# Altium PCB PCB.PcbDoc
Units mm, origin at the board's own origin, x right, y up, seen from the top; angles counter-clockwise.
Board outline 42.3 x 32.8 mm, 2 copper layers (Top Layer, Bottom Layer), stack 1.571 mm thick; 14 components, 10 nets, 39 pads, 8 vias.
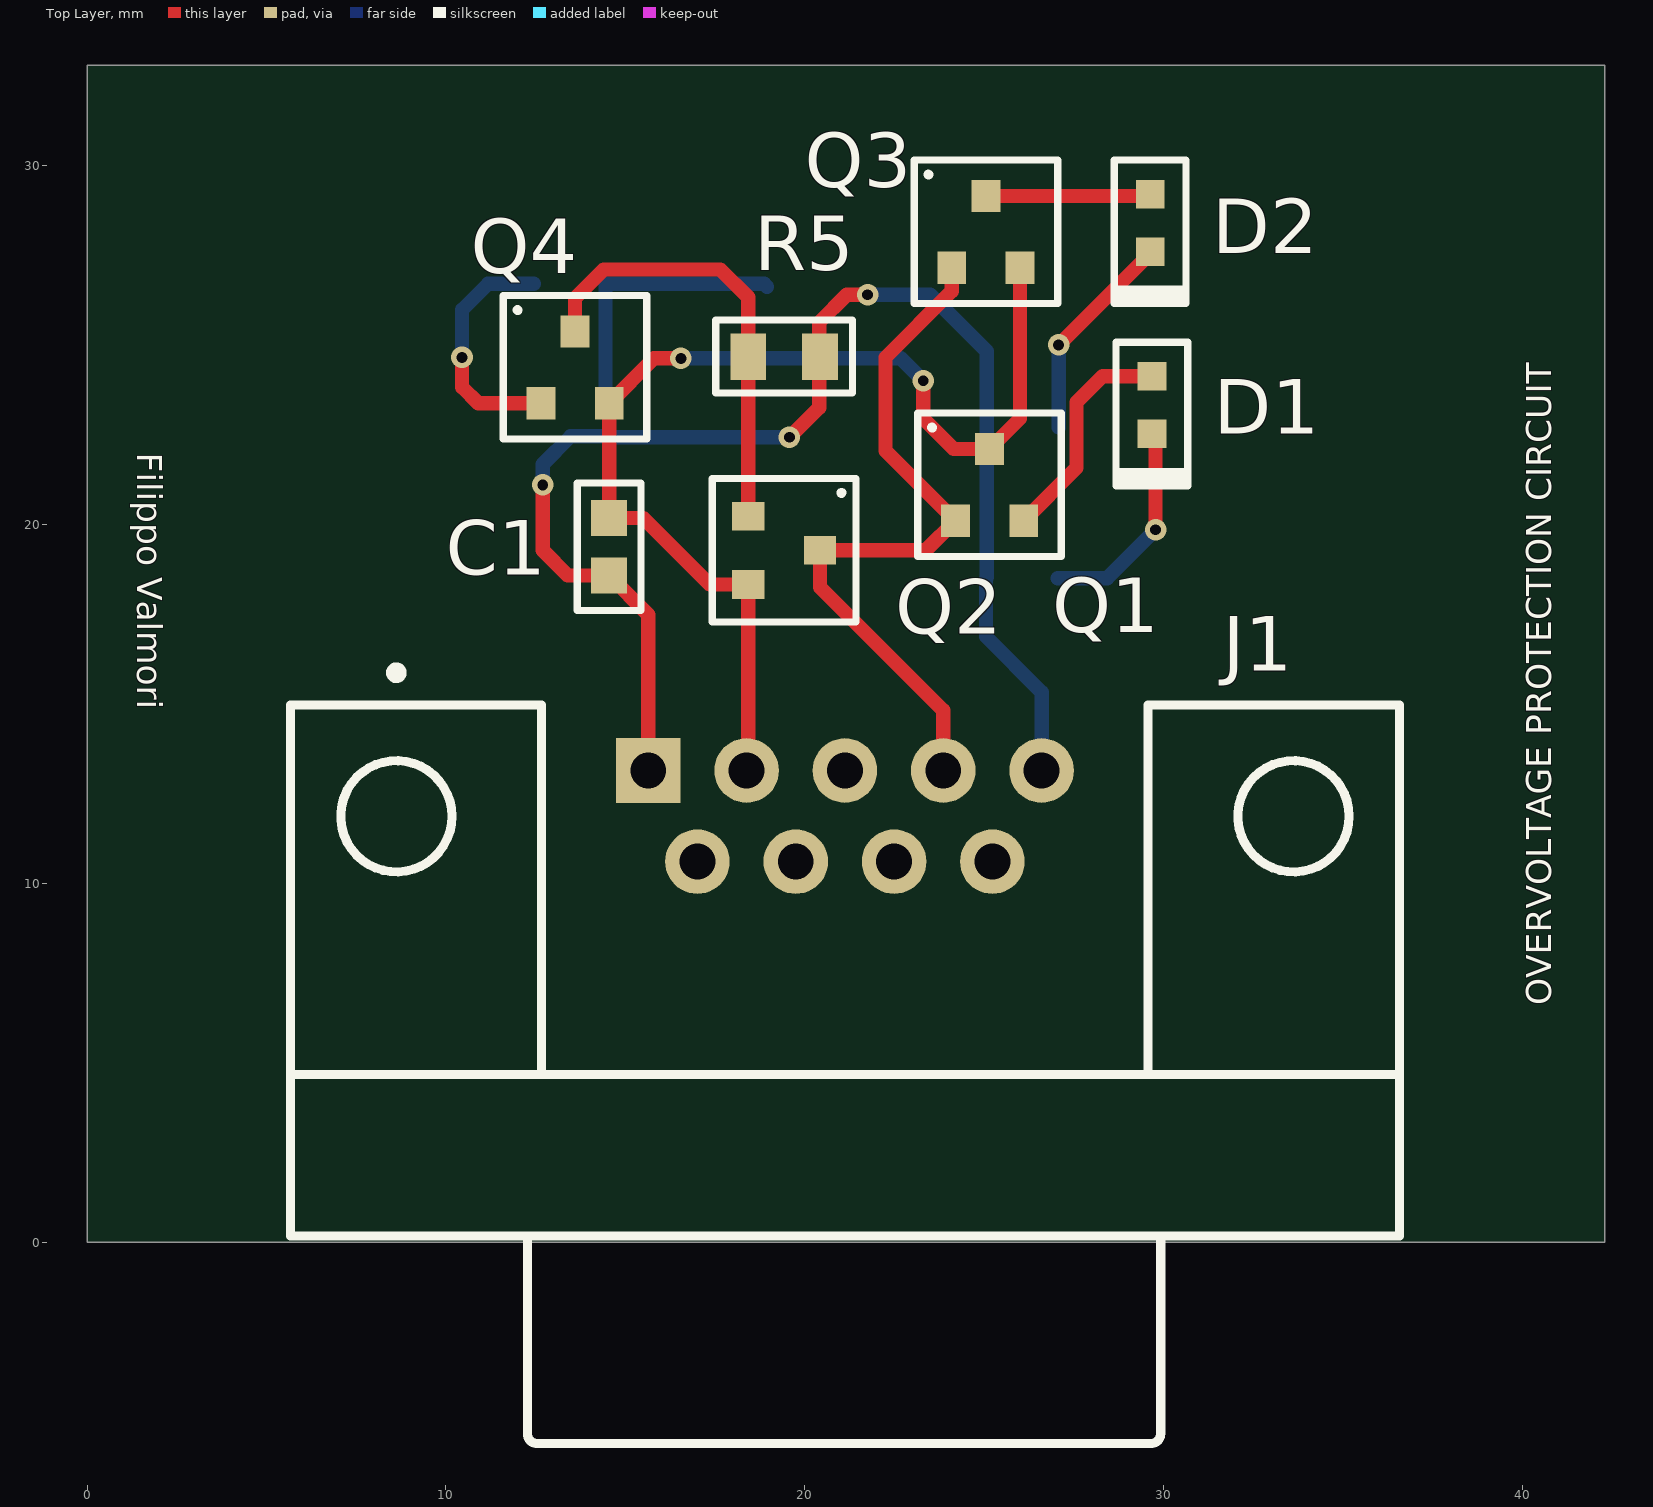
[diagram p0: Top Layer view]
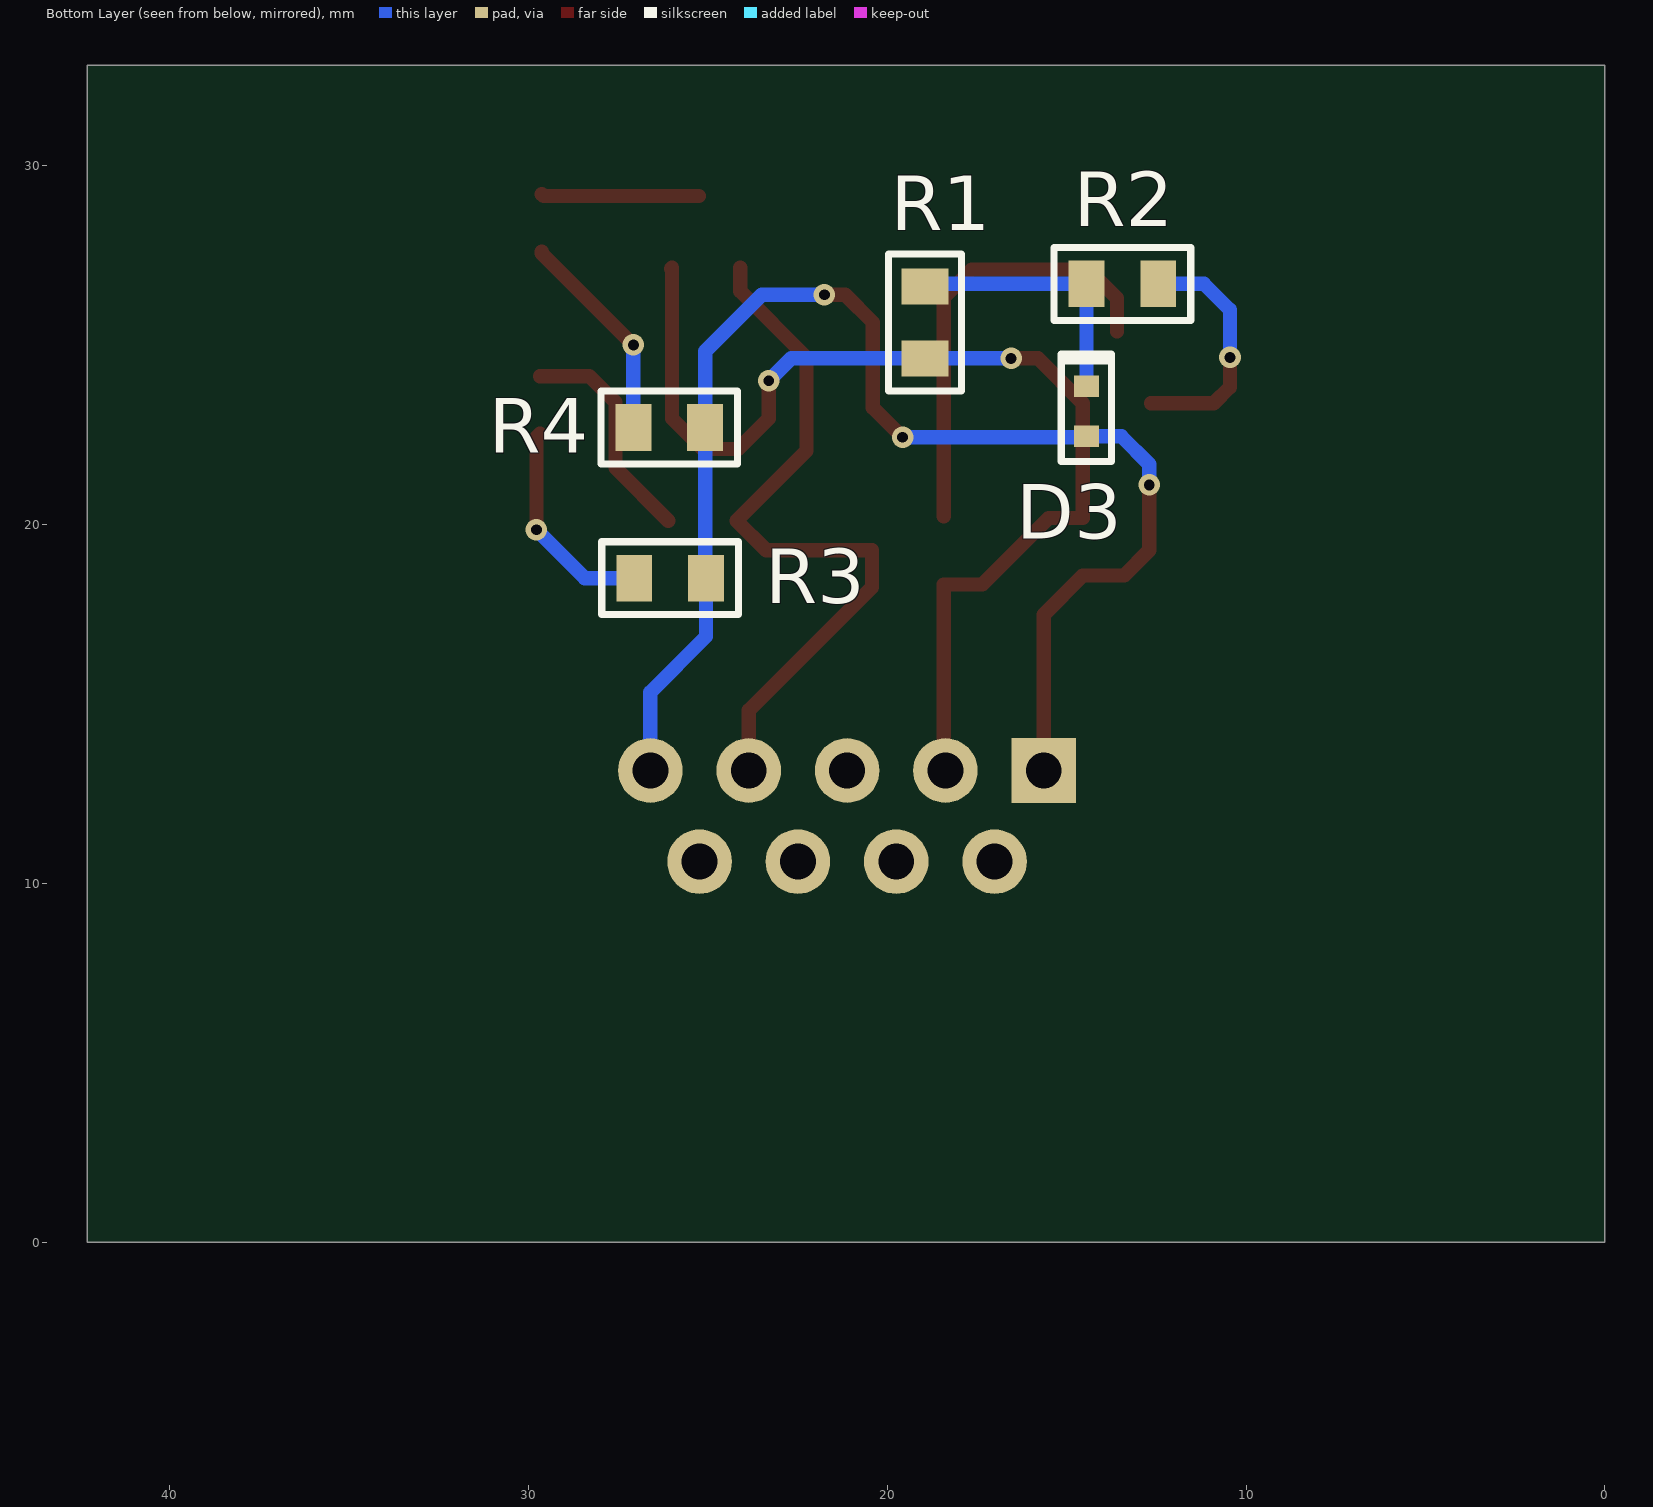
[diagram p1: Bottom Layer view, seen from below]
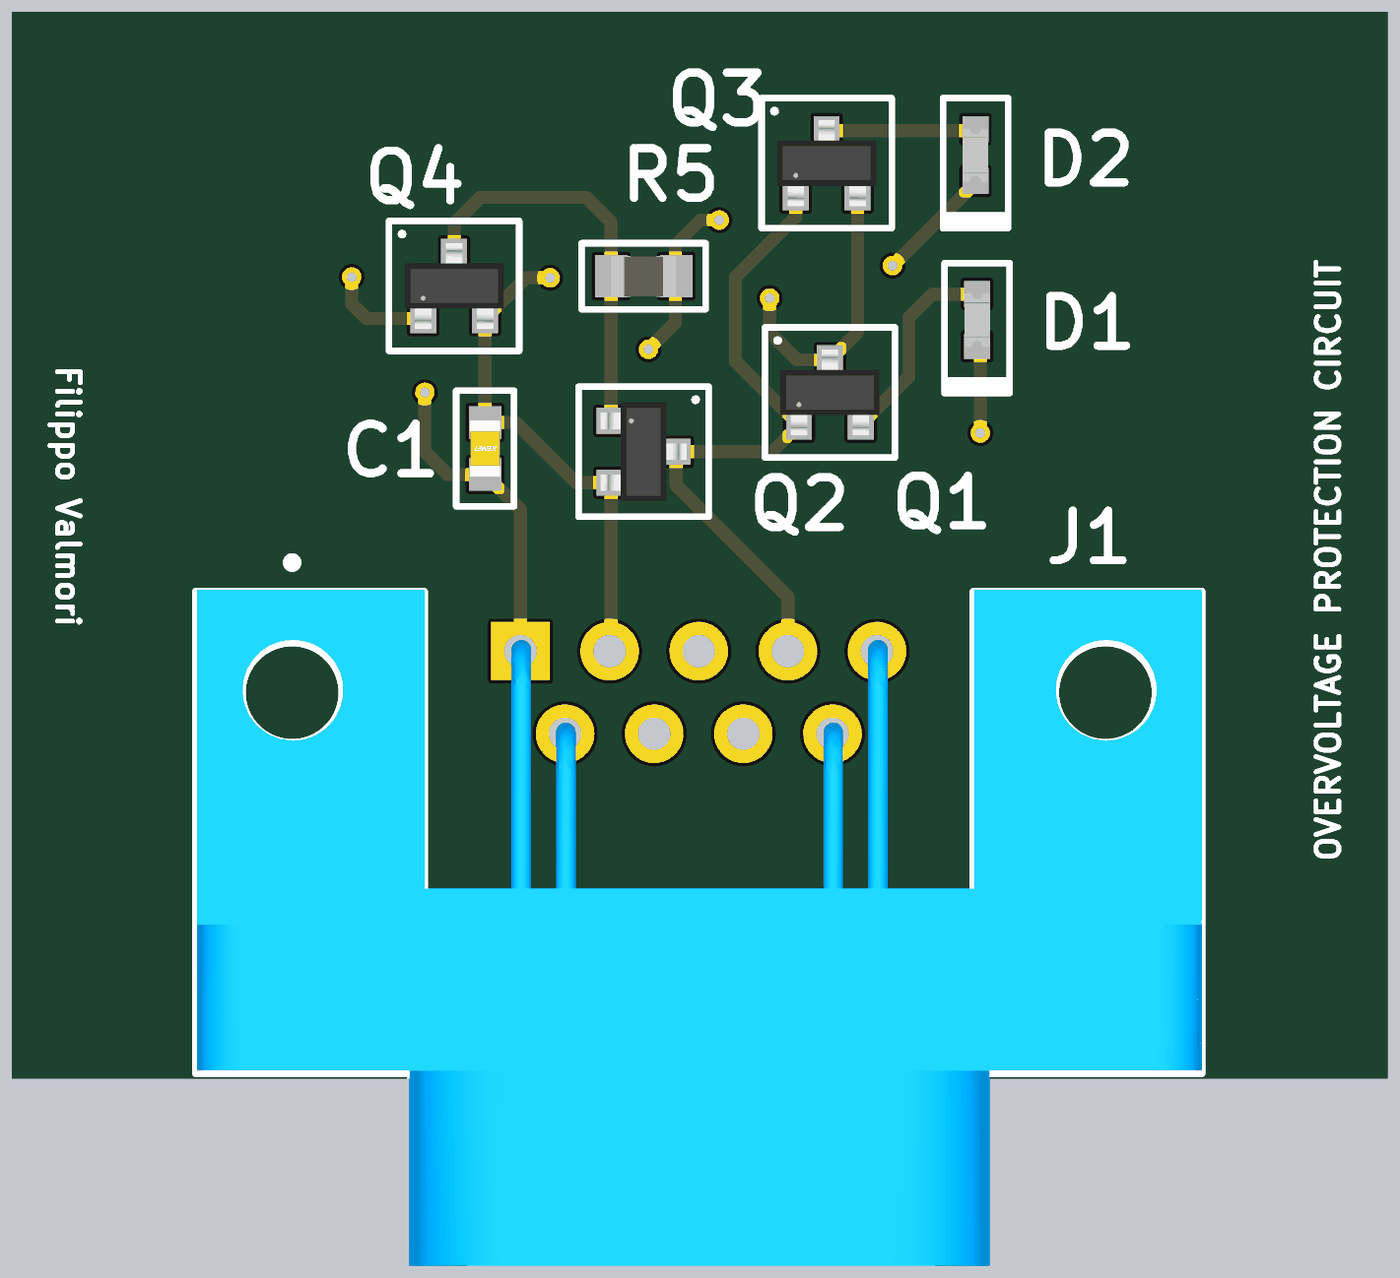
[diagram p2: 3D render of the assembled board from above, using the file's embedded part models]
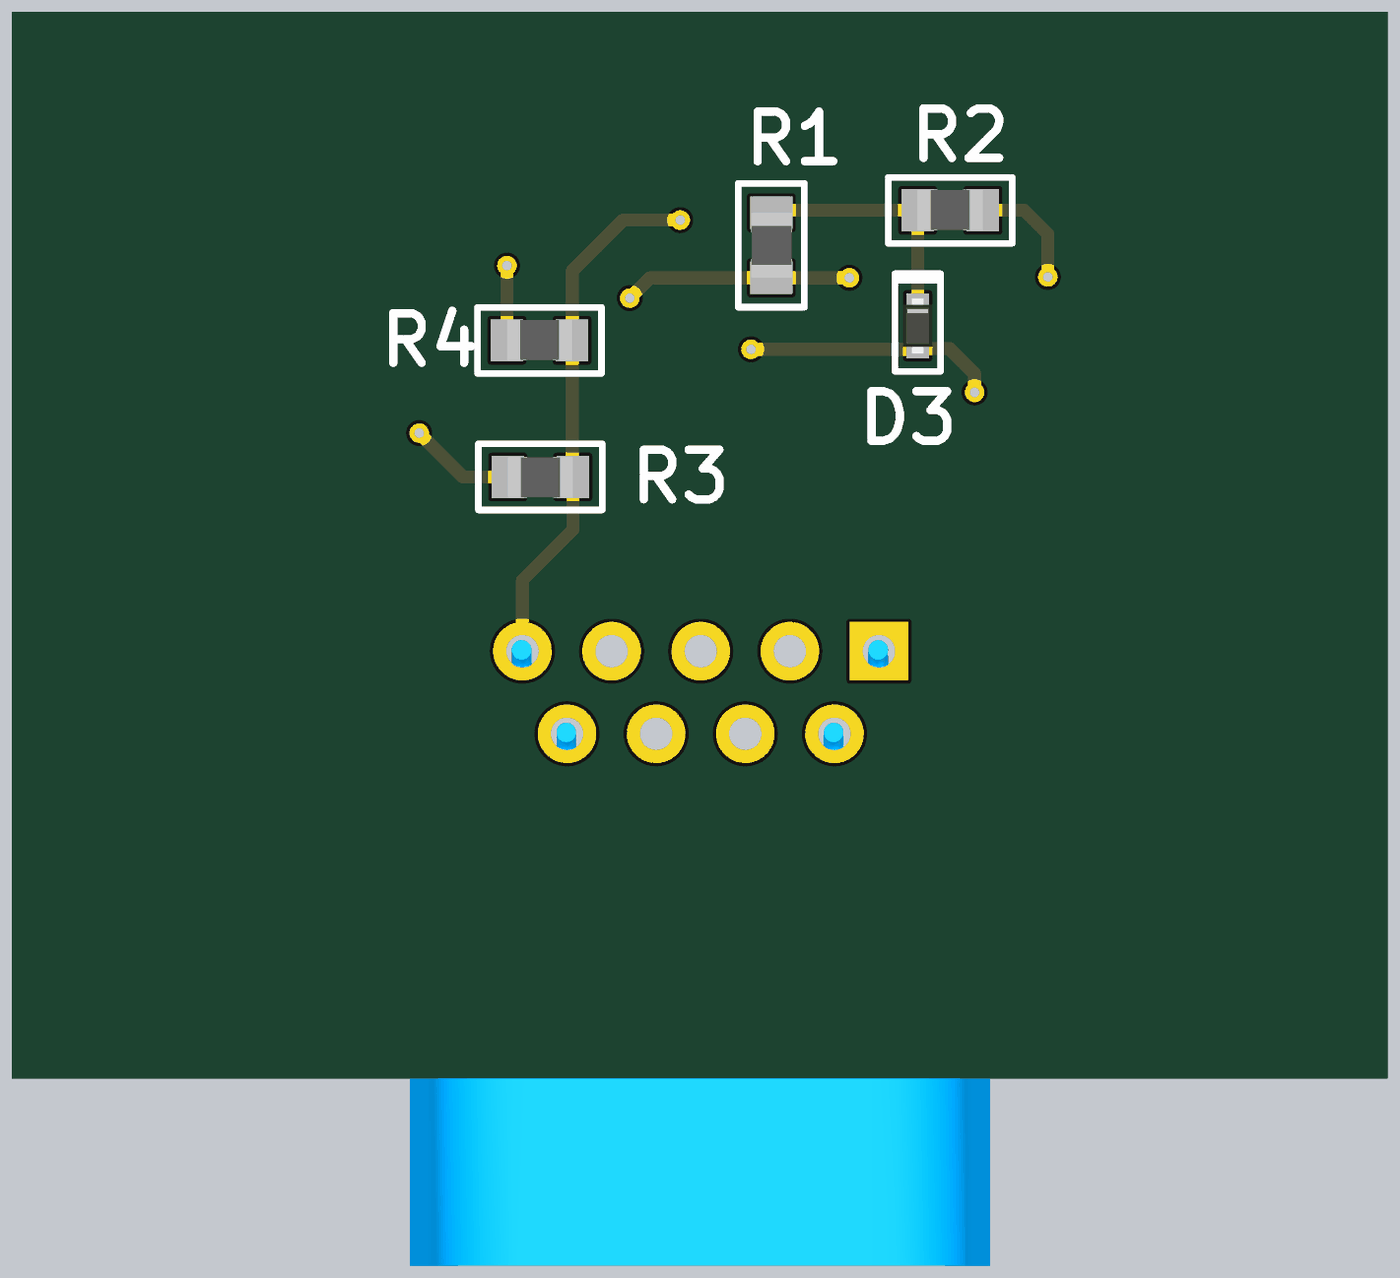
[diagram p3: 3D render of the assembled board from below, using the file's embedded part models]

## Layer stack, top to bottom
Top Solder: solder mask 0.0102, Solder Resist, Dk 3.5
Top Layer: signal copper 0.0356
Dielectric 1: dielectric 1.5, FR-4, Dk 4.8
Bottom Layer: signal copper 0.0356
Bottom Solder: solder mask 0.0102, Solder Resist, Dk 3.5

## Board outline
0,0 42.3,0 42.3,32.8 0,32.8

## Design rules (kind name [scope] priority, off if disabled: settings)
Clearance [All] p1: gap=0.3 ignorepadtopadclearanceinfootprint=FALSE
PolygonConnect [All] p1: connectstyle=Relief reliefconductorwidth=0.254 reliefentries=4 polygonreliefangle="90 Angle" airgapwidth=0.254
RoutingVias [All] p1: holewidth=0.3 width=0.6 viastyle="Through Hole" minholewidth=0.3 minwidth=0.6 maxholewidth=0.3 maxwidth=0.6
SilkToSolderMaskClearance [IsPad] p1: minsilkscreentomaskgap=0.15 clearancetoexposedcopper=TRUE
SolderMaskExpansion [All] p1: expansion=0.102
Width [All] p1: maxlimit=0.5 minlimit=0.3 preferedwidth=0.4
29 further rules are at their usual default settings.

## Components (designator, comment, footprint, x,y, rotation, side; value= is the part's Value field where it differs from the comment)
C1 "100n" CAP-0603 14.55,19.375 r270 top
D1 "GREEN" LED-0603 29.675,23.325 r270 top
D2 "RED" LED-0603 29.625,28.4 r270 top
D3 "ZENER" ZENER-SOD523 14.45,23.15 r90 bottom
J1 "DB9-M" DB9 8.62,11.865 r0 top
Q1 "MOSFET-N" NMOS-SOT23 25.15,20.1 r0 top
Q2 "BJT-P" BJT-SOT23 18.425,19.275 r270 top
Q3 "MOSFET-P" PMOS-SOT23 25.05,27.15 r0 top
Q4 "BJT-P" BJT-SOT23 13.6,23.375 r0 top
R1 "3k" RES-0805 18.95,25.625 r270 bottom
R2 "750" RES-0805 13.45,26.7 r180 bottom
R3 "3k" RES-0805 26.05,18.5 r0 bottom
R4 "3k" RES-0805 26.075,22.7 r180 bottom
R5 "33k" RES-0805 19.425,24.675 r180 top

## Footprints (in the part's own frame and the unit in brackets; to place one, negate y for a bottom-side part, rotate by r counter-clockwise, add the part's x,y. Pads: shape width x height; smd on the part's side, far side on the other; paste and mask are expansions set on the pad)
BJT-SOT23 [mm]
  rect 0.8x0.9 smd: 1(-0.95,0) 2(0.95,0) 3(0,2)
  silkscreen extent -2,-1 2,3, body extent -1.52,-0.32 1.52,2.32, height 1.12
CAP-0603 [mm]
  rect 1x1 smd: 1(-0.8,0) 2(0.8,0)
  silkscreen extent -1.78,-0.89 1.78,0.89, body extent -0.87,-0.48 0.87,0.48, height 0.94
DB9 [mm]
  rect 1.8x1.8 hole 1: 1(7.02,1.275)
  round 1.8 hole 1: 2(9.76,1.275) 3(12.5,1.275) 4(15.24,1.275) 5(17.98,1.275) 6(8.39,-1.265) 7(11.13,-1.265) 8(13.87,-1.265) 9(16.61,-1.265)
  silkscreen extent -2.95,-17.48 27.95,4.14, body extent -2.93,-17.62 27.98,3.17, height 12.91
LED-0603 [mm]
  rect 0.8x0.8 smd: 1(-0.8,0) 2(0.8,0)
  silkscreen extent -1.75,-1 2.25,1, body extent -0.81,-0.39 0.81,0.39, height 0.73
NMOS-SOT23 [mm]
  rect 0.8x0.9 smd: 1(-0.95,0) 2(0.95,0) 3(0,2)
  silkscreen extent -2,-1 2,3, body extent -1.52,-0.32 1.52,2.32, height 1.12
PMOS-SOT23 [mm]
  rect 0.8x0.9 smd: 1(-0.95,0) 2(0.95,0) 3(0,2)
  silkscreen extent -2,-1 2,3, body extent -1.52,-0.32 1.52,2.32, height 1.12
RES-0805 [mm]
  rect 1x1.3 smd: 1(-1,0) 2(1,0)
  silkscreen extent -1.9,-1.02 1.91,1.02, body extent -1,-0.61 1,0.64, height 0.51
ZENER-SOD523 [mm]
  rect 0.6x0.7 smd: 1(-0.7,0) 2(0.7,0)
  silkscreen extent -1.4,-0.7 1.6,0.7, body extent -0.85,-0.45 0.85,0.45, height 0.82

## Part data
C1: library part C0603C104M3RACTU, "Multilayer Ceramic Capacitors MLCC - SMD/SMT 25volts 0.1uF X7R 20%", Capacitance=100nF, Case/Package=0603, Case Code (Metric)=1608, Dielectric=X7R, Dielectric Material=Ceramic, Manufacturer=KEMET, Max Operating Temperature=125°C, Min Operating Temperature=-55°C, Package Quantity=1, Supplier Part Number 1=399-1283-6-ND, Tolerance=20%, Voltage Rating=25V, Case Code (Imperial)=0603, Category=Capacitors, ComponentLink1Description=https://www.verical.com/server-webapp/html/getDatasheet?partID=58462&src-supplier=Verical, ComponentLink1URL=https://www.verical.com/server-webapp/html/getDatasheet?partID=58462&src-supplier=Verical, ComponentLink2Description=http://www.farnell.com/datasheets/2746054.pdf?src-supplier=Newark, ComponentLink2URL=http://www.farnell.com/datasheets/2746054.pdf?src-supplier=Newark, ComponentLink3Description=https://www.verical.com/server-webapp/html/getDatasheet?partID=344365&src-supplier=Verical, ComponentLink3URL=https://www.verical.com/server-webapp/html/getDatasheet?partID=344365&src-supplier=Verical, ComponentLink4Description=http://www.alliedelec.com/m/d/9bfe7773041ffe9d406e68bc7b377fdd.pdf?src-supplier=Allied+Electronics, ComponentLink4URL=http://www.alliedelec.com/m/d/9bfe7773041ffe9d406e68bc7b377fdd.pdf?src-supplier=Allied+Electronics, Depth=0.8mm, Height=0.8mm, Lead Pitch=0.7mm, Length=1.6mm, Manufacturer Part Number=C0603C104M3RACTU, Mount="Surface Mount,PCB", Number of Pins=2, Packaging="Tape and Reel", Pricing 1="1=0.1, 10=0.06, 100=0.0267, 500=0.01906, 1000=0.01497 (USD)", Radiation Hardening=No, REACH SVHC="No SVHC", Stock 1=15620, Supplier 1=Digi-Key, Termination=SMD/SMT, Thickness=0.034inch, Voltage Rating (DC)=25V, Width=0.031inch
D1: library part 598-8070-107F, "DIALIGHT - 5988070107F - LED, Green, SMD, 0603, 20 mA, 2 V, 570 nm", Case/Package=0603, Case Code (Metric)=1608, Color=Green, Forward Current=20mA, Forward Voltage=2V, Lens Color=Colorless,Clear, Manufacturer=Dialight, Max Operating Temperature=100°C, Min Operating Temperature=-30°C, Package Quantity=4000, Power Dissipation=60mW, Reverse Voltage=5V, Supplier Part Number 1=350-2035-6-ND, Case Code (Imperial)=0603, Category=Diodes, ComponentLink1Description=http://www.mouser.com/ds/2/109/SMT_selector_guide-267443.pdf?src-supplier=Mouser, ComponentLink1URL=http://www.mouser.com/ds/2/109/SMT_selector_guide-267443.pdf?src-supplier=Mouser, ComponentLink2Description=http://uk.rs-online.com/webdocs/0ae2/0900766b80ae2975.pdf?src-supplier=RSComponents, ComponentLink2URL=http://uk.rs-online.com/webdocs/0ae2/0900766b80ae2975.pdf?src-supplier=RSComponents, ComponentLink3Description=http://www.farnell.com/datasheets/1720200.pdf?src-supplier=Element14, ComponentLink3URL=http://www.farnell.com/datasheets/1720200.pdf?src-supplier=Element14, ComponentLink4Description=https://media.digikey.com/pdf/Data%20Sheets/Dialight%20PDFs/598_Series_0603_Pkg.pdf?src-supplier=Digi-Key, ComponentLink4URL=https://media.digikey.com/pdf/Data%20Sheets/Dialight%20PDFs/598_Series_0603_Pkg.pdf?src-supplier=Digi-Key, ComponentLink5Description=https://www.alliedelec.com/m/d/745256ca487aea7b70ea31e2d673d5bb.pdf?src-supplier=Allied+Electronics, ComponentLink5URL=https://www.alliedelec.com/m/d/745256ca487aea7b70ea31e2d673d5bb.pdf?src-supplier=Allied+Electronics, ComponentLink6Description=http://www.onlinecomponents.com/productFiles/mf-DIA/mdei5980603.pdf?src-supplier=Onlinecomponents.com, ComponentLink6URL=http://www.onlinecomponents.com/productFiles/mf-DIA/mdei5980603.pdf?src-supplier=Onlinecomponents.com, ComponentLink7Description=https://www.verical.com/server-webapp/html/getDatasheet?partID=146438&src-supplier=Verical, ComponentLink7URL=https://www.verical.com/server-webapp/html/getDatasheet?partID=146438&src-supplier=Verical, ComponentLink8Description=http://www.dialight.com/Assets/Brochures_And_Catalogs/Indication/SMT_selector_guide.pdf?src-supplier=Future+Electronics, ComponentLink8URL=http://www.dialight.com/Assets/Brochures_And_Catalogs/Indication/SMT_selector_guide.pdf?src-supplier=Future+Electronics, Depth=0.8mm, Dominant Wavelength=568nm, Height=0.7mm, Illumination Color=Green, Lead Free="Lead Free", Length=1.6mm, Lens Size=0.8mm, Lens Style=Flat,Rectangular,Diffused,Colorless,Clear, Lens Transparency=Clear, Luminous Intensity=20mcd, Manufacturer Part Number=598-8070-107F, Mount="Surface Mount", Number of Elements=1, Number of LEDs=1, Number of Pins=2, Packaging="Tape and Reel", Pricing 1="1=0.42, 10=0.3, 100=0.1333, 500=0.09332, 1000=0.07666 (USD)", Radiation Hardening=No, REACH SVHC="No SVHC", Stock 1=4673, Supplier 1=Digi-Key, Test Current=20mA, Viewing Angle=140°, Wavelength=570nm, Width=0.8mm
D2: library part 598-8020-107F, "DIALIGHT   5988020107F   LED, RED ORANGE, 150MCD, 630NM", Case/Package=0603, Case Code (Metric)=1608, Color=Red,Orange, Forward Current=20mA, Forward Voltage=2V, Illumination Color=Orange, Lens Color=Colorless,Clear, Manufacturer=Dialight, Max Operating Temperature=100°C, Min Operating Temperature=-30°C, Package Quantity=4000, Power Dissipation=55mW, Reverse Voltage=5V, Supplier Part Number 1=350-2030-6-ND, Case Code (Imperial)=0603, Category=Diodes, ComponentLink1Description=https://www.alliedelec.com/m/d/67ce6cfd66c5ca65d1535dac34303b05.pdf?src-supplier=Allied+Electronics, ComponentLink1URL=https://www.alliedelec.com/m/d/67ce6cfd66c5ca65d1535dac34303b05.pdf?src-supplier=Allied+Electronics, ComponentLink2Description=http://www.onlinecomponents.com/productFiles/mf-DIA/mdei5980603.pdf?src-supplier=Onlinecomponents.com, ComponentLink2URL=http://www.onlinecomponents.com/productFiles/mf-DIA/mdei5980603.pdf?src-supplier=Onlinecomponents.com, ComponentLink3Description=https://media.digikey.com/pdf/Data%20Sheets/Dialight%20PDFs/598_Series_0603_Pkg.pdf?src-supplier=Digi-Key, ComponentLink3URL=https://media.digikey.com/pdf/Data%20Sheets/Dialight%20PDFs/598_Series_0603_Pkg.pdf?src-supplier=Digi-Key, ComponentLink4Description=https://www.verical.com/server-webapp/html/getDatasheet?partID=187920&src-supplier=Verical, ComponentLink4URL=https://www.verical.com/server-webapp/html/getDatasheet?partID=187920&src-supplier=Verical, ComponentLink5Description=http://www.farnell.com/datasheets/25658.pdf?src-supplier=Element14, ComponentLink5URL=http://www.farnell.com/datasheets/25658.pdf?src-supplier=Element14, ComponentLink6Description=http://www.dialight.com/Assets/Brochures_And_Catalogs/Indication/SMT_selector_guide.pdf?src-supplier=Future+Electronics, ComponentLink6URL=http://www.dialight.com/Assets/Brochures_And_Catalogs/Indication/SMT_selector_guide.pdf?src-supplier=Future+Electronics, Depth=0.8mm, Dominant Wavelength=625nm, Height=0.7mm, Lead Free="Lead Free", Length=1.6mm, Lens Size=0.8mm, Lens Style=Flat,Diffused,Colorless,Rectangular,Clear, Lens Transparency=Clear, Luminous Intensity=150mcd, Manufacturer Part Number=598-8020-107F, Mount="Surface Mount", Number of Elements=1, Number of LEDs=1, Number of Pins=2, Packaging="Tape and Reel", Pricing 1="1=0.47, 10=0.336, 100=0.1495, 500=0.10464, 1000=0.08595 (USD)", Radiation Hardening=No, REACH SVHC="No SVHC", Stock 1=14692, Supplier 1=Digi-Key, Test Current=20mA, Viewing Angle=140°, Wavelength=630nm, Width=0.8mm
D3: library part BZT585B10T-7, "DIODE ZENER 10V 350MW SOD523", Case/Package=SOD-523-2, Forward Voltage=900mV, Manufacturer=Diodes, Max Operating Temperature=150°C, Max Power Dissipation=350mW, Max Reverse Leakage Current=200nA, Min Operating Temperature=-65°C, Package Quantity=3000, Supplier Part Number 1=BZT585B10T-7DIDKR-ND, Test Current=5mA, Tolerance=2%, Zener Voltage=10V, Category=Diodes, ComponentLink1Description=http://www.mouser.com/ds/2/115/BZT585BxVxT-318149.pdf?src-supplier=Mouser, ComponentLink1URL=http://www.mouser.com/ds/2/115/BZT585BxVxT-318149.pdf?src-supplier=Mouser, ComponentLink2Description=http://diodes.com/datasheets/BZT585BxVxT.pdf?src-supplier=Avnet, ComponentLink2URL=http://diodes.com/datasheets/BZT585BxVxT.pdf?src-supplier=Avnet, ComponentLink3Description=https://www.diodes.com/assets/Datasheets/BZT585BxVxT.pdf?src-supplier=Digi-Key, ComponentLink3URL=https://www.diodes.com/assets/Datasheets/BZT585BxVxT.pdf?src-supplier=Digi-Key, Contact Plating=Tin,Matte, Element Configuration=Single, ESD Protection=No, Impedance=10R, Manufacturer Part Number=BZT585B10T-7, Mount="Surface Mount", Number of Pins=2, Packaging="Tape and Reel", Peak Reverse Current=200nA, Pricing 1="1=0.22, 10=0.177, 25=0.148, 100=0.0724, 250=0.07128, 500=0.0604, 1000=0.04197 (USD)", Stock 1=3462, Supplier 1=Digi-Key, Voltage Tolerance=2%, Weight=3.5E-05oz, Zener Current=5mA
J1: library part 09661227801, "D-Sub Standard Connectors DSUB SV ML SSDP ANG73-254 09P AU3", Current Rating=7.5A, Flammability Rating="UL94 V-0", Manufacturer="HARTING Technology", Max Operating Temperature=125°C, Min Operating Temperature=-55°C, Package Quantity=100, Supplier Part Number 1=1195-4989-ND, Category=Connectors, ComponentLink1Description=https://b2b.harting.com/files/download/PRD/PDF_TS/0966122X80X_BL01_R29733_100202197DRW002A.PDF?src-supplier=Digi-Key, ComponentLink1URL=https://b2b.harting.com/files/download/PRD/PDF_TS/0966122X80X_BL01_R29733_100202197DRW002A.PDF?src-supplier=Digi-Key, Connector Type=D-Sub,Plug,Signal, Contact Material="Copper Alloy", Housing Material=Polybutylene, Length=30.9mm, Manufacturer Part Number=09661227801, Mount="Through Hole", Number of Ports=1, Number of Positions=9, Number of Rows=2, Number of Terminals=9, Orientation="Right Angle", Packaging=Bulk, Pricing 1="1=4.15, 10=3.984, 25=3.652, 50=3.486, 100=3.32, 250=2.905, 500=2.822, 1000=2.407 (USD)", Stock 1=102, Supplier 1=Digi-Key, Termination=Solder
Q1: library part 2N7002LT1G, "Trans MOSFET N-CH 60V 0.115A 3-Pin SOT-23 T/R", Case/Package=SOT-23-3, Continuous Drain Current (ID)=115mA, Drain to Source Breakdown Voltage=60V, Drain to Source Resistance=7.5R, Gate to Source Voltage (Vgs)=20V, Input Capacitance=50pF, Manufacturer="ON Semiconductor", Max Operating Temperature=150°C, Max Power Dissipation=225mW, Min Operating Temperature=-55°C, Package Quantity=1, Power Dissipation=300mW, Supplier Part Number 1=2N7002LT1GOSDKR-ND, Threshold Voltage=2.5V, Category=Transistors, ComponentLink1Description=http://www.onsemi.com/pub/Collateral/2N7002L-D.PDF?src-supplier=Digi-Key, ComponentLink1URL=http://www.onsemi.com/pub/Collateral/2N7002L-D.PDF?src-supplier=Digi-Key, ComponentLink2Description=http://www.farnell.com/datasheets/1747988.pdf?src-supplier=Element14, ComponentLink2URL=http://www.farnell.com/datasheets/1747988.pdf?src-supplier=Element14, ComponentLink3Description=http://www.farnell.com/datasheets/1747988.pdf?src-supplier=Newark, ComponentLink3URL=http://www.farnell.com/datasheets/1747988.pdf?src-supplier=Newark, ComponentLink4Description=http://www.farnell.com/datasheets/2354034.pdf?src-supplier=Element14, ComponentLink4URL=http://www.farnell.com/datasheets/2354034.pdf?src-supplier=Element14, ComponentLink5Description=http://www.onsemi.com/pub_link/Collateral/2N7002L-D.PDF?src-supplier=Future+Electronics, ComponentLink5URL=http://www.onsemi.com/pub_link/Collateral/2N7002L-D.PDF?src-supplier=Future+Electronics, ComponentLink6Description=http://www.onsemi.com/pub/Collateral/2N7002L-D.PDF?src-supplier=Avnet, ComponentLink6URL=http://www.onsemi.com/pub/Collateral/2N7002L-D.PDF?src-supplier=Avnet, ComponentLink7Description=http://www.onsemi.com/pub/Collateral/2N7002L-D.PDF?src-supplier=Avnet+Europe, ComponentLink7URL=http://www.onsemi.com/pub/Collateral/2N7002L-D.PDF?src-supplier=Avnet+Europe, ComponentLink8Description=http://www.onsemi.com/pub/Collateral/2N7002L-D.PDF?src-supplier=Avnet+Asia, ComponentLink8URL=http://www.onsemi.com/pub/Collateral/2N7002L-D.PDF?src-supplier=Avnet+Asia, Contact Plating=Tin,Matte, Current Rating=115mA, Drain to Source Voltage (Vdss)=60V, Element Configuration=Single, Halogen Free="Halogen Free", Height=1.01mm, Lead Free="Lead Free", Length=3.04mm, Manufacturer Part Number=2N7002LT1G, Nominal Vgs=2.5V, Number of Channels=1, Number of Elements=1, Number of Pins=3, On-State Resistance=7.5R, Packaging="Tape and Reel", Pricing 1="1=0.18, 10=0.164, 25=0.1564, 100=0.0688, 250=0.066, 500=0.054, 1000=0.0375 (USD)", Radiation Hardening=No, Rds On Max=7.5R, REACH SVHC="No SVHC", Stock 1=1300580, Supplier 1=Digi-Key, Turn-Off Delay Time=40ns, Turn-On Delay Time=20ns, Voltage Rating (DC)=60V, Width=1.4mm
Q2 Q4: library part MMBT2907ALT1G, "MMBT2907AL Series 60 V 600 mA SMT PNP General Purpose Transistor - SOT-23", Case/Package=SOT-23-3, Collector Base Voltage (VCBO)=60V, Collector Emitter Breakdown Voltage=-60V, Collector Emitter Saturation Voltage=-1.6V, Current Rating=-600mA, Emitter Base Voltage (VEBO)=5V, Frequency=200MHz, Manufacturer="ON Semiconductor", Max Collector Current=600mA, Max Operating Temperature=150°C, Max Power Dissipation=300mW, Min Operating Temperature=-55°C, Package Quantity=3000, Supplier Part Number 1=MMBT2907ALT1GOSCT-ND, Category=Transistors, Collector Emitter Voltage (VCEO)=60V, ComponentLink1Description=http://www.onsemi.com/pub/Collateral/MMBT2907ALT1-D.PDF?src-supplier=Digi-Key, ComponentLink1URL=http://www.onsemi.com/pub/Collateral/MMBT2907ALT1-D.PDF?src-supplier=Digi-Key, ComponentLink2Description=https://www.alliedelec.com/m/d/f1da87220e07dfe91b55a9a93f81e6fa.pdf?src-supplier=Allied+Electronics, ComponentLink2URL=https://www.alliedelec.com/m/d/f1da87220e07dfe91b55a9a93f81e6fa.pdf?src-supplier=Allied+Electronics, ComponentLink3Description=http://www.farnell.com/datasheets/2028683.pdf?src-supplier=Farnell, ComponentLink3URL=http://www.farnell.com/datasheets/2028683.pdf?src-supplier=Farnell, ComponentLink4Description=http://www.onsemi.com/pub/Collateral/MMBT2907ALT1-D.PDF?src-supplier=Element14, ComponentLink4URL=http://www.onsemi.com/pub/Collateral/MMBT2907ALT1-D.PDF?src-supplier=Element14, ComponentLink5Description=http://www.onsemi.com/pub/Collateral/MMBT2907ALT1-D.PDF?src-supplier=Future+Electronics, ComponentLink5URL=http://www.onsemi.com/pub/Collateral/MMBT2907ALT1-D.PDF?src-supplier=Future+Electronics, ComponentLink6Description=http://www.onsemi.com/pub/Collateral/MMBT2907ALT1-D.PDF?src-supplier=Avnet, ComponentLink6URL=http://www.onsemi.com/pub/Collateral/MMBT2907ALT1-D.PDF?src-supplier=Avnet, ComponentLink7Description=http://www.farnell.com/datasheets/1744610.pdf?src-supplier=Element14, ComponentLink7URL=http://www.farnell.com/datasheets/1744610.pdf?src-supplier=Element14, ComponentLink8Description=http://www.farnell.com/datasheets/2028683.pdf?src-supplier=Element14, ComponentLink8URL=http://www.farnell.com/datasheets/2028683.pdf?src-supplier=Element14, ComponentLink9Description=https://www.verical.com/server-webapp/html/getDatasheet?partID=44366&src-supplier=Verical, ComponentLink9URL=https://www.verical.com/server-webapp/html/getDatasheet?partID=44366&src-supplier=Verical, Contact Plating=Tin,Matte, Element Configuration=Single, Gain Bandwidth Product=200MHz, Height=0.94mm, hFE Min=75, Lead Free="Lead Free", Length=2.9mm, Manufacturer Part Number=MMBT2907ALT1G, Max Breakdown Voltage=60V, Max Frequency=200MHz, Number of Elements=1, Number of Pins=3, Packaging="Tape and Reel", Polarity=PNP, Power Dissipation=300mW, Pricing 1="1=0.15, 10=0.134, 25=0.1276, 100=0.0561, 250=0.05384, 500=0.04406, 1000=0.0306 (USD)", Radiation Hardening=No, REACH SVHC="No SVHC", Stock 1=211221, Supplier 1=Digi-Key, Transition Frequency=200MHz, Type="General Purpose", Voltage Rating (DC)=-60V, Width=1.3mm
Q3: library part TP0610K-T1-E3, "MOSFET P-CH 60V 185MA SOT23-3", Case/Package=TO-236, Continuous Drain Current (ID)=185mA, Drain to Source Breakdown Voltage=-60V, Drain to Source Resistance=10R, Drain to Source Voltage (Vdss)=60V, Gate to Source Voltage (Vgs)=20V, Input Capacitance=23pF, Manufacturer=Vishay, Max Operating Temperature=150°C, Max Power Dissipation=350mW, Min Operating Temperature=-55°C, Package Quantity=1, Supplier Part Number 1=TP0610K-T1-E3DKR-ND, Threshold Voltage=-3V, Category=Transistors, ComponentLink1Description=https://www.verical.com/server-webapp/html/getDatasheet?partID=110418&src-supplier=Verical, ComponentLink1URL=https://www.verical.com/server-webapp/html/getDatasheet?partID=110418&src-supplier=Verical, ComponentLink2Description=http://www.farnell.com/datasheets/2049195.pdf?src-supplier=Newark, ComponentLink2URL=http://www.farnell.com/datasheets/2049195.pdf?src-supplier=Newark, ComponentLink3Description=https://www.alliedelec.com/m/d/8f71ef69d286bdc1948cb77e0f9cb5b1.pdf?src-supplier=Allied+Electronics, ComponentLink3URL=https://www.alliedelec.com/m/d/8f71ef69d286bdc1948cb77e0f9cb5b1.pdf?src-supplier=Allied+Electronics, ComponentLink4Description=http://www.vishay.com/docs/71411/tp0610k.pdf?src-supplier=Avnet+Europe, ComponentLink4URL=http://www.vishay.com/docs/71411/tp0610k.pdf?src-supplier=Avnet+Europe, ComponentLink5Description=http://www.farnell.com/datasheets/1747937.pdf?src-supplier=Farnell, ComponentLink5URL=http://www.farnell.com/datasheets/1747937.pdf?src-supplier=Farnell, ComponentLink6Description=http://www.farnell.com/datasheets/1747937.pdf?src-supplier=Element14, ComponentLink6URL=http://www.farnell.com/datasheets/1747937.pdf?src-supplier=Element14, ComponentLink7Description=http://www.vishay.com/docs/71411/tp0610k.pdf?src-supplier=Avnet, ComponentLink7URL=http://www.vishay.com/docs/71411/tp0610k.pdf?src-supplier=Avnet, ComponentLink8Description=http://www.farnell.com/datasheets/2049195.pdf?src-supplier=Element14, ComponentLink8URL=http://www.farnell.com/datasheets/2049195.pdf?src-supplier=Element14, ComponentLink9Description=http://www.vishay.com/docs/71411/tp0610k.pdf?src-supplier=Digi-Key, ComponentLink9URL=http://www.vishay.com/docs/71411/tp0610k.pdf?src-supplier=Digi-Key, ComponentLink10Description=http://datasheet.iiic.cc/vishay_[siliconix]/TP0610K-T1-E3.pdf?src-supplier=IIIC, ComponentLink10URL=http://datasheet.iiic.cc/vishay_[siliconix]/TP0610K-T1-E3.pdf?src-supplier=IIIC, Element Configuration=Single, Height=1.02mm, Lead Free="Lead Free", Length=3.04mm, Manufacturer Part Number=TP0610K-T1-E3, Mount="Surface Mount", Nominal Vgs=-3V, Number of Channels=1, Number of Elements=1, Number of Pins=3, On-State Resistance=10R, Packaging="Tape and Reel", Power Dissipation=350mW, Pricing 1="1=0.39, 10=0.313, 25=0.2868, 100=0.1801, 250=0.17808, 500=0.16676, 1000=0.11339 (USD)", Radiation Hardening=No, Rds On Max=6R, REACH SVHC=Unknown, Stock 1=130184, Supplier 1=Digi-Key, Turn-On Delay Time=20ns, Weight=0.050717oz, Width=1.4mm
R1 R3 R4: library part RNCP0805FTD3K01, "RES SMD 3.01K OHM 1% 1/4W 0805", Case/Package=0805, Case Code (Metric)=2012, Manufacturer="Stackpole Electronics", Max Operating Temperature=155°C, Max Power Dissipation=250mW, Min Operating Temperature=-55°C, Resistance=3.01kR, Supplier Part Number 1=RNCP0805FTD3K01DKR-ND, Temperature Coefficient=100ppm/°C, Tolerance=1%, Case Code (Imperial)=0805, Category=Resistors, ComponentLink1Description=http://www.seielect.com/Catalog/SEI-rncp.pdf?src-supplier=Digi-Key, ComponentLink1URL=http://www.seielect.com/Catalog/SEI-rncp.pdf?src-supplier=Digi-Key, ComponentLink2Description=https://www.seielect.com/catalog/SEI-Packaging.pdf?src-supplier=Digi-Key, ComponentLink2URL=https://www.seielect.com/catalog/SEI-Packaging.pdf?src-supplier=Digi-Key, ComponentLink3Description=https://www.seielect.com/Catalog/SEI-rncp.pdf?src-supplier=Avnet, ComponentLink3URL=https://www.seielect.com/Catalog/SEI-rncp.pdf?src-supplier=Avnet, Composition="Thin Film", Contact Plating=Tin,Matte, Features="Moisture Resistant,Anti-Sulfur", Height=0.024inch, Length=0.079inch, Manufacturer Part Number=RNCP0805FTD3K01, Mount="Surface Mount", Number of Terminations=2, Packaging="Tape and Reel", Pricing 1="1=0.1, 10=0.069, 100=0.0264, 1000=0.01162, 2500=0.01003 (USD)", Radiation Hardening=No, Stock 1=3825, Supplier 1=Digi-Key, Width=0.049inch
R2: library part RNCP0805FTD750R, "RES SMD 750 OHM 1% 1/4W 0805", Case/Package=0805, Case Code (Metric)=2012, Manufacturer="Stackpole Electronics", Max Operating Temperature=155°C, Max Power Dissipation=250mW, Min Operating Temperature=-55°C, Resistance=750R, Supplier Part Number 1=RNCP0805FTD750RDKR-ND, Temperature Coefficient=100ppm/°C, Tolerance=1%, Case Code (Imperial)=0805, Category=Resistors, ComponentLink1Description=http://www.seielect.com/Catalog/SEI-rncp.pdf?src-supplier=Digi-Key, ComponentLink1URL=http://www.seielect.com/Catalog/SEI-rncp.pdf?src-supplier=Digi-Key, ComponentLink2Description=https://www.seielect.com/Catalog/SEI-rncp.pdf?src-supplier=Avnet, ComponentLink2URL=https://www.seielect.com/Catalog/SEI-rncp.pdf?src-supplier=Avnet, ComponentLink3Description=https://www.seielect.com/catalog/SEI-Packaging.pdf?src-supplier=Digi-Key, ComponentLink3URL=https://www.seielect.com/catalog/SEI-Packaging.pdf?src-supplier=Digi-Key, Composition="Thin Film", Contact Plating=Tin,Matte, Features="Moisture Resistant,Anti-Sulfur", Height=0.024inch, Lead Free="Lead Free", Length=0.079inch, Manufacturer Part Number=RNCP0805FTD750R, Mount="Surface Mount", Number of Terminations=2, Packaging="Tape and Reel", Pricing 1="1=0.1, 10=0.072, 100=0.0277, 1000=0.0122, 2500=0.01053 (USD)", Radiation Hardening=No, Stock 1=16430, Supplier 1=Digi-Key, Width=0.049inch
R5: library part RNCP0805FTD33K2, "RES SMD 33.2K OHM 1% 1/4W 0805", Case/Package=0805, Case Code (Metric)=2012, Manufacturer="Stackpole Electronics", Max Operating Temperature=155°C, Max Power Dissipation=250mW, Min Operating Temperature=-55°C, Resistance=33.2kR, Supplier Part Number 1=RNCP0805FTD33K2DKR-ND, Temperature Coefficient=100ppm/°C, Tolerance=1%, Case Code (Imperial)=0805, Category=Resistors, ComponentLink1Description=http://www.seielect.com/Catalog/SEI-rncp.pdf?src-supplier=Digi-Key, ComponentLink1URL=http://www.seielect.com/Catalog/SEI-rncp.pdf?src-supplier=Digi-Key, ComponentLink2Description=https://www.seielect.com/catalog/SEI-Packaging.pdf?src-supplier=Digi-Key, ComponentLink2URL=https://www.seielect.com/catalog/SEI-Packaging.pdf?src-supplier=Digi-Key, Composition="Thin Film", Features="Moisture Resistant,Anti-Sulfur", Height=0.024inch, Length=0.079inch, Manufacturer Part Number=RNCP0805FTD33K2, Mount="Surface Mount", Number of Terminations=2, Packaging="Tape and Reel", Pricing 1="1=0.1, 10=0.069, 100=0.0264, 1000=0.01162, 2500=0.01003 (USD)", Stock 1=3563, Supplier 1=Digi-Key, Width=0.049inch

## Via types
v1: diameter 0.6, hole 0.3, Top Layer to Bottom Layer, 8 vias

## Nets (pads, with @x,y where several pads share a name; then routed paths per layer and width w, separated by ;. In a path a pad name is that pad's centre, name@x,y a point inside that pad or via, vN(x,y) a via of type N, cw(c..) or ccw(c..) an arc to the next point about the centre after c; other vN are vias at no path point)
GND: C1.2 D3.1 J1.1 J1.5 R3.1 R4.2 R5.1 | length 39.2
  Top Layer w0.4: v1(12.7,21.1) 12.7,19.275 13.4,18.575 C1.2 15.64,17.485 J1.1 ; v1(19.575,22.425) 20.4,23.25 20.4,25.625 21.175,26.4 v1(21.75,26.4)
  Bottom Layer w0.4: v1(12.7,21.1) 12.7,21.675 13.475,22.45 D3.1 14.475,22.425 v1(19.575,22.425) ; v1(21.75,26.4) 23.5,26.4 25.075,24.825 R4.2 25.075,18.525 R3.1 25.05,16.875 26.6,15.325 J1.5
IN: C1.1 J1.2 Q1.3 Q2.2 Q3.2 Q4.2 R1.2 | length 31.3
  Top Layer w0.4: v1(16.55,24.625) 15.8,24.625 Q4.2 C1.1 15.5,20.175 17.35,18.325 Q2.2 18.425,13.185 J1.2 ; v1(23.3,24) 23.3,22.95 24.15,22.1 Q1.3 26,22.95 Q3.2 Q3.2@26.025,27.125
  Bottom Layer w0.4: v1(16.55,24.625) R1.2 22.675,24.625 v1(23.3,24)
NetD1_1: D1.1 Q1.2 | length 6.3
  Top Layer w0.4: Q1.2 27.575,21.575 27.575,23.4 28.3,24.125 D1.1
NetD1_2: D1.2 R3.2 | length 6
  Top Layer w0.4: D1.2 29.775,22.425 v1(29.775,19.85)
  Bottom Layer w0.4: R3.2 28.425,18.5 v1(29.775,19.85)
NetD2_1: D2.1 Q3.3 | length 4.4
  Top Layer w0.4: Q3.3@25.25,29.15 29.575,29.15 D2.1
NetD2_2: D2.2 R4.1 | length 6
  Top Layer w0.4: v1(27.075,25) 29.625,27.55 D2.2
  Bottom Layer w0.4: R4.1 v1(27.075,25)
NetD3_2: D3.2 R1.1 R2.1 | length 7.4
  Bottom Layer w0.4: D3.2 R2.1 18.875,26.7 R1.1
NetQ2_1: Q2.1 Q4.3 R5.2 | length 12.5
  Top Layer w0.4: Q4.3 13.6,26.3 14.4,27.1 17.65,27.1 18.425,26.325 R5.2 Q2.1
NetQ4_1: Q4.1 R2.2 | length 6.8
  Top Layer w0.4: v1(10.45,24.65) 10.45,23.825 10.9,23.375 Q4.1
  Bottom Layer w0.4: v1(10.45,24.65) 10.45,25.975 11.175,26.7 R2.2
OUT: J1.4 Q1.1 Q2.3 Q3.1 | length 20.3
  Top Layer w0.4: J1.4@23.875,13.155 J1.4 23.86,14.815 20.425,18.25 Q2.3 23.375,19.275 Q1.1 22.25,22.05 22.25,24.65 24.1,26.5 Q3.1
pads on no net: J1.3 J1.6 J1.7 J1.8 J1.9

## Silkscreen, mask and mechanical layers (free items; w line width, h text height)
Top Overlay:
  text "Filippo Valmori" at 1.4,22 h0.7 r270
  text "OVERVOLTAGE PROTECTION CIRCUIT" at 40.8,6.6 h0.7 r90
Board Outline:
  the board outline again, w0.254